# Altium PCB PCB2.PcbDoc
Units mil, origin at the board's own origin, x right, y up, seen from the top; angles counter-clockwise.
Board outline 3955 x 3395 mil, 2 copper layers (Top Layer, Bottom Layer); 46 components, 53 nets, 193 pads, 14 vias.
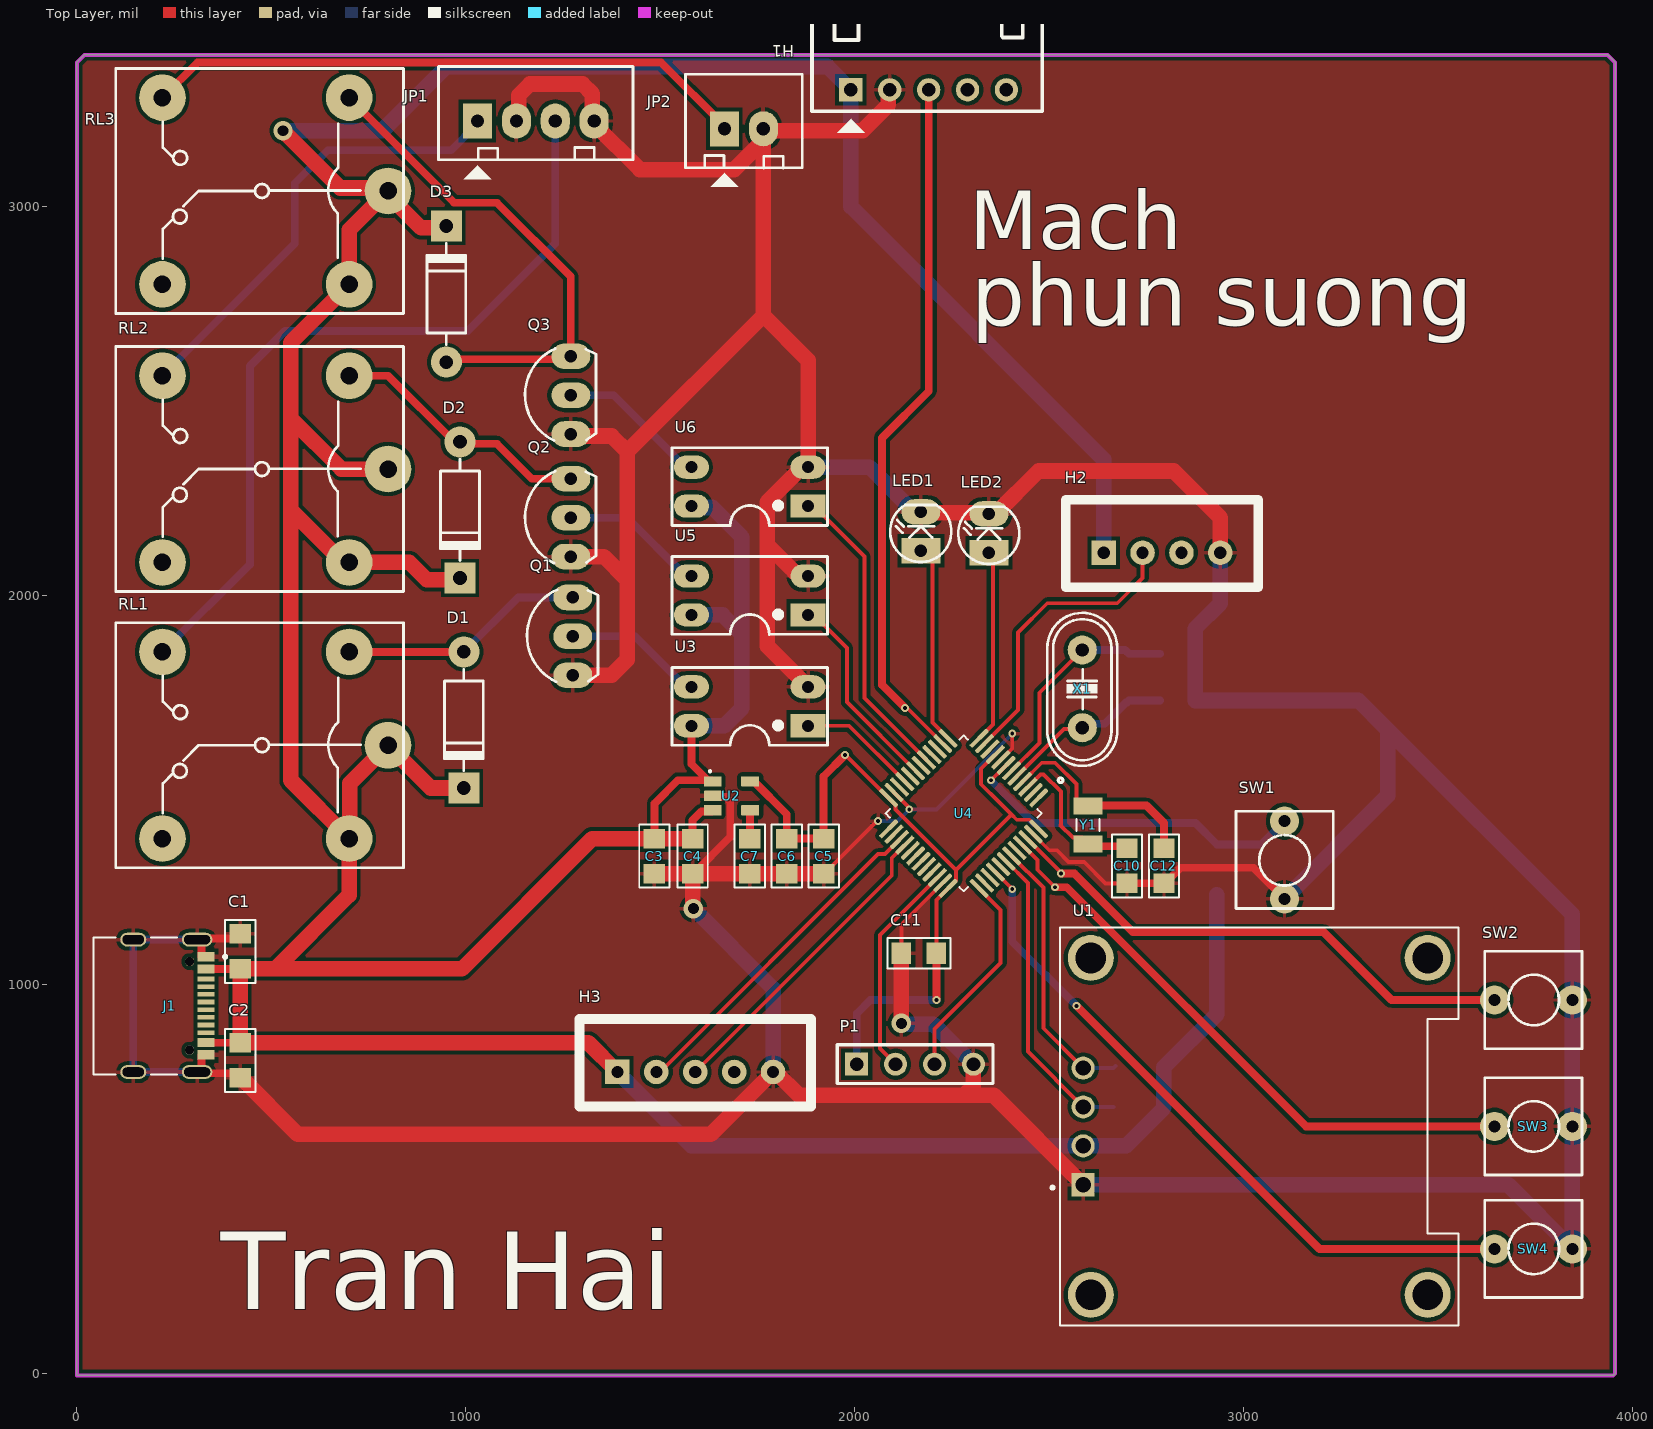
[diagram p0: Top Layer view]
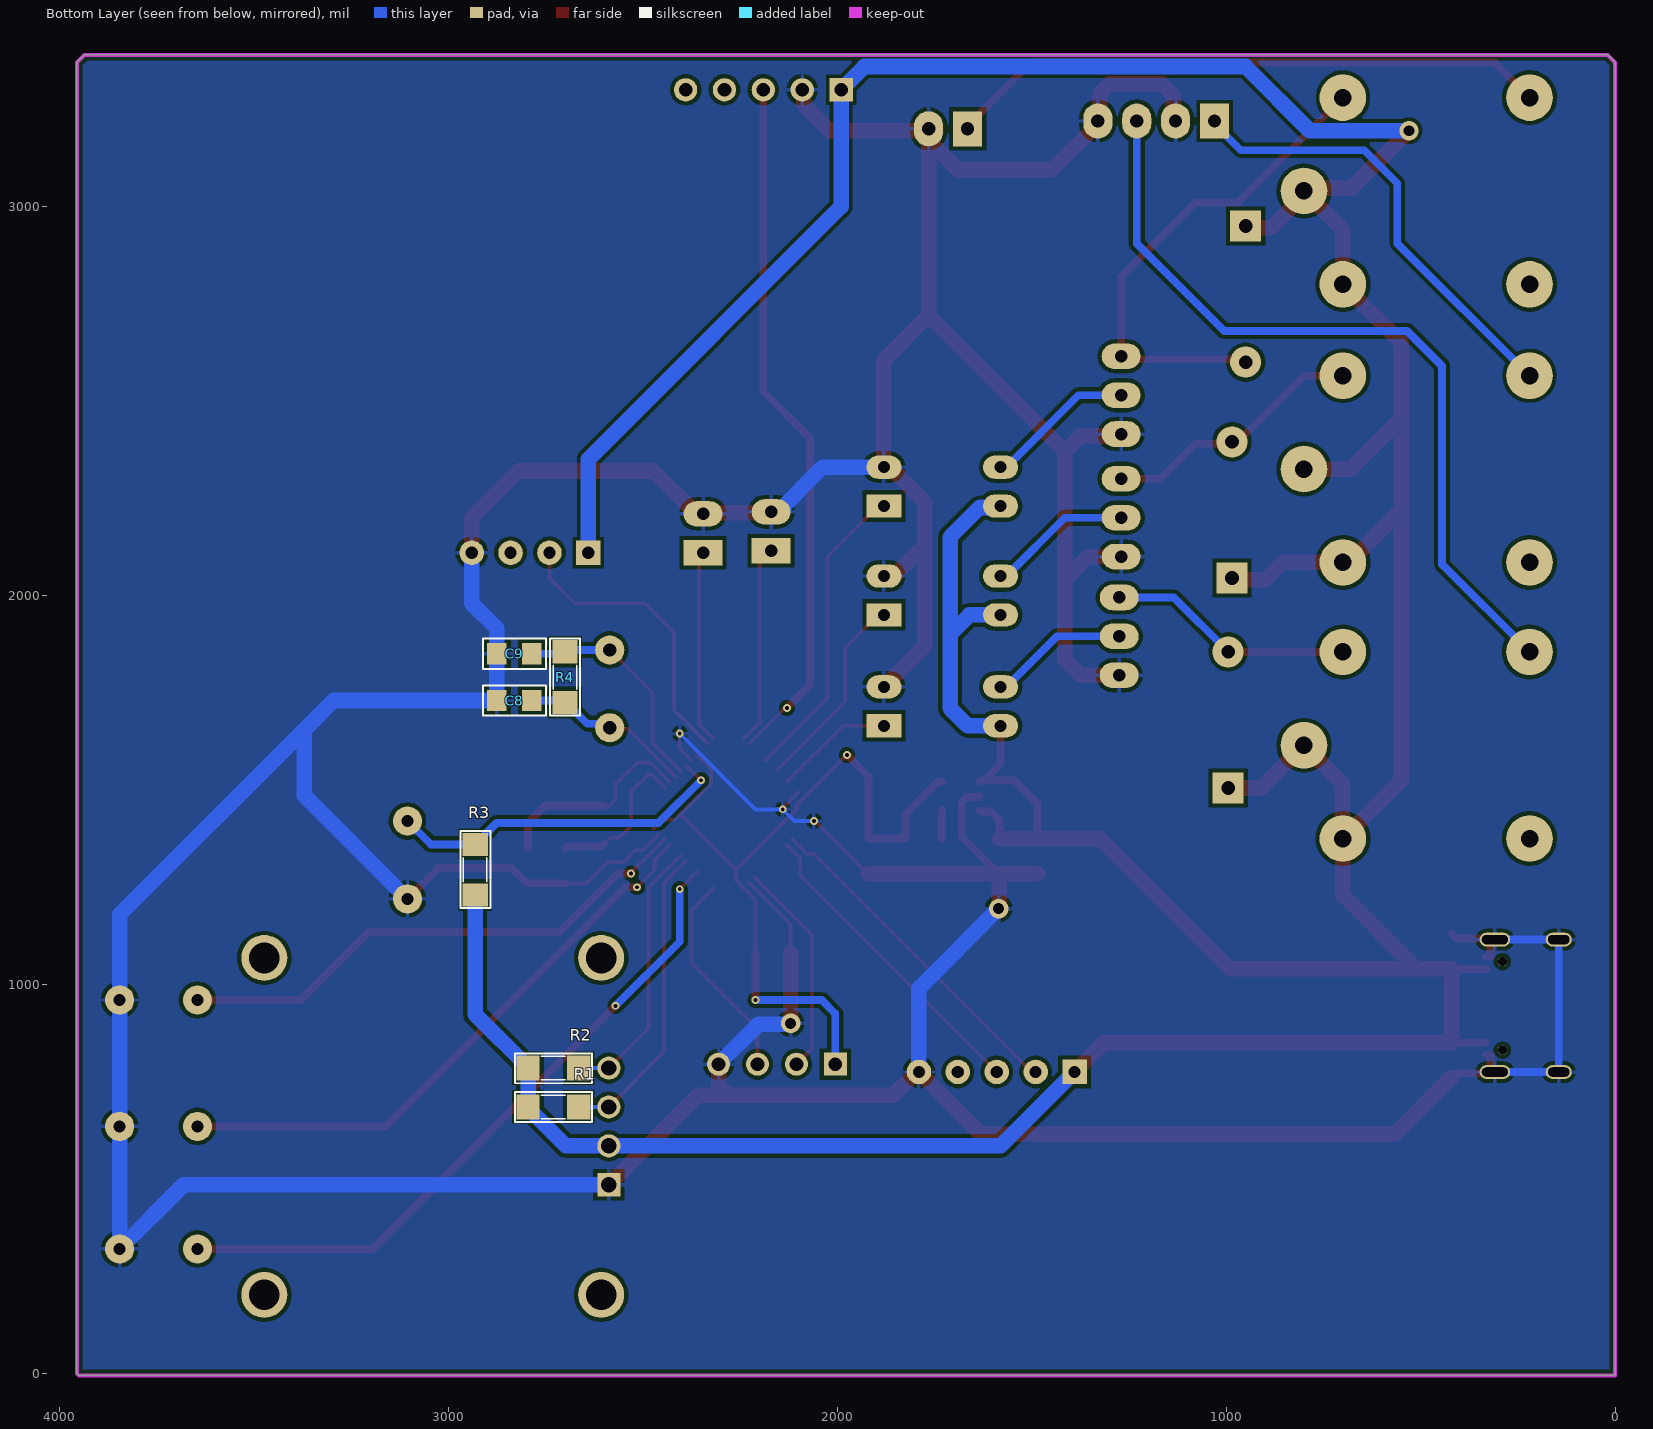
[diagram p1: Bottom Layer view, seen from below]
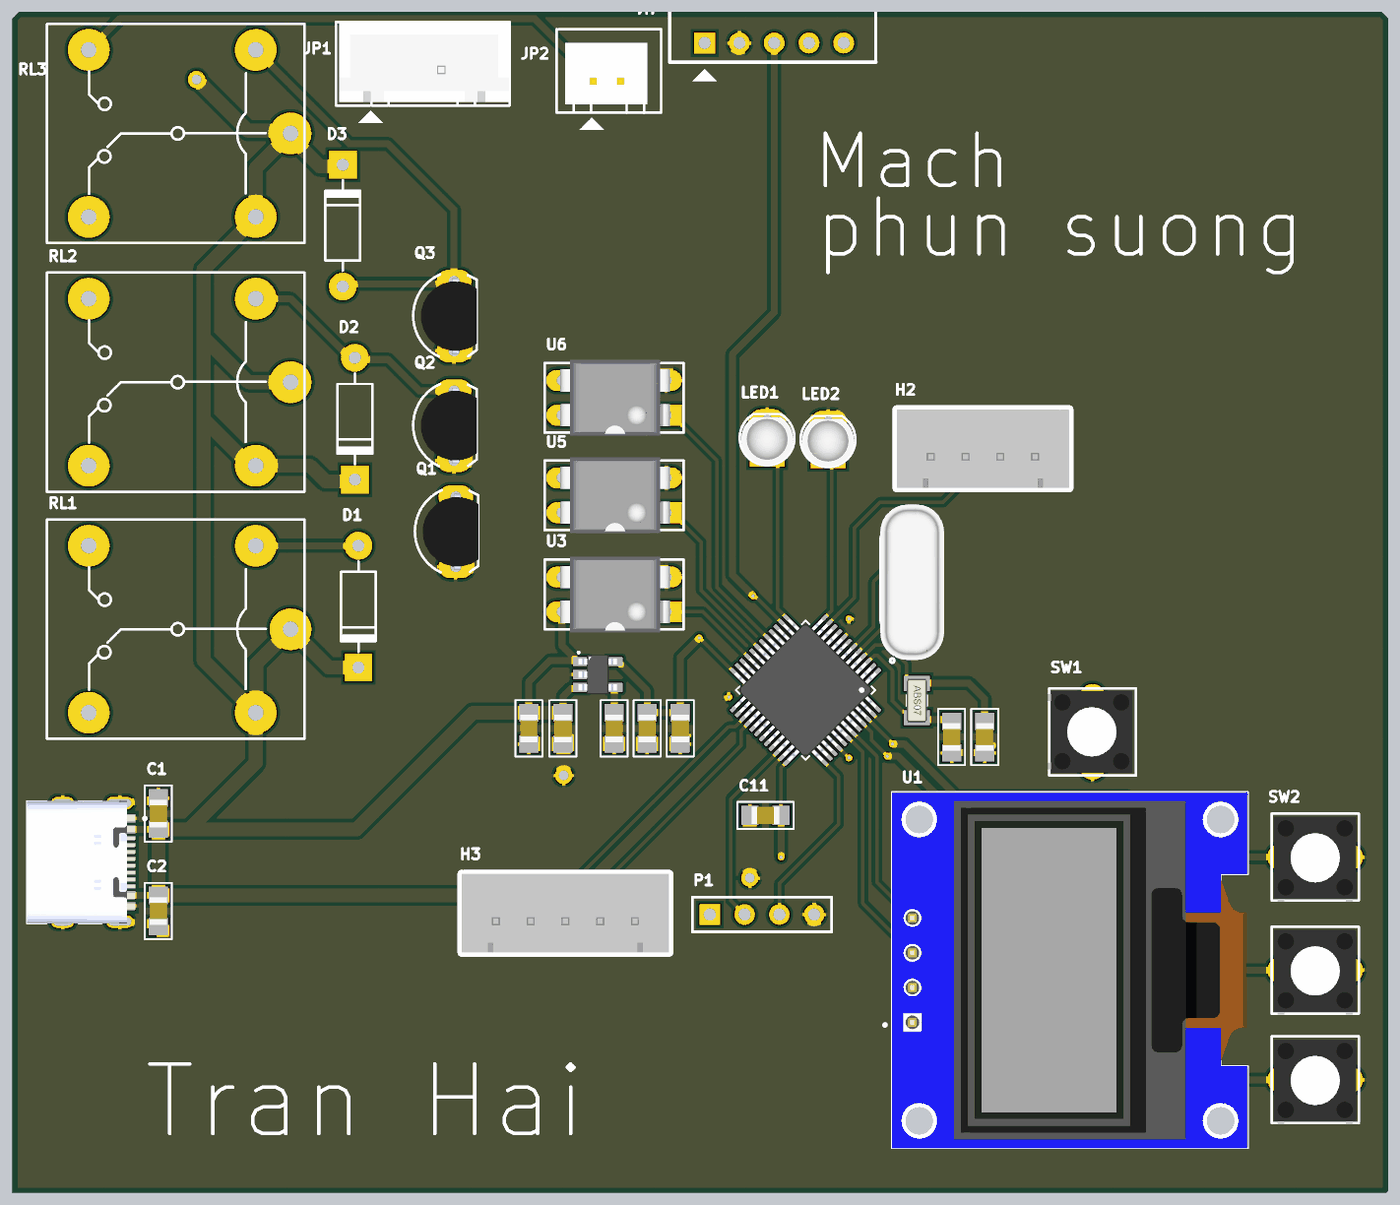
[diagram p2: 3D render of the assembled board from above, using the file's embedded part models]
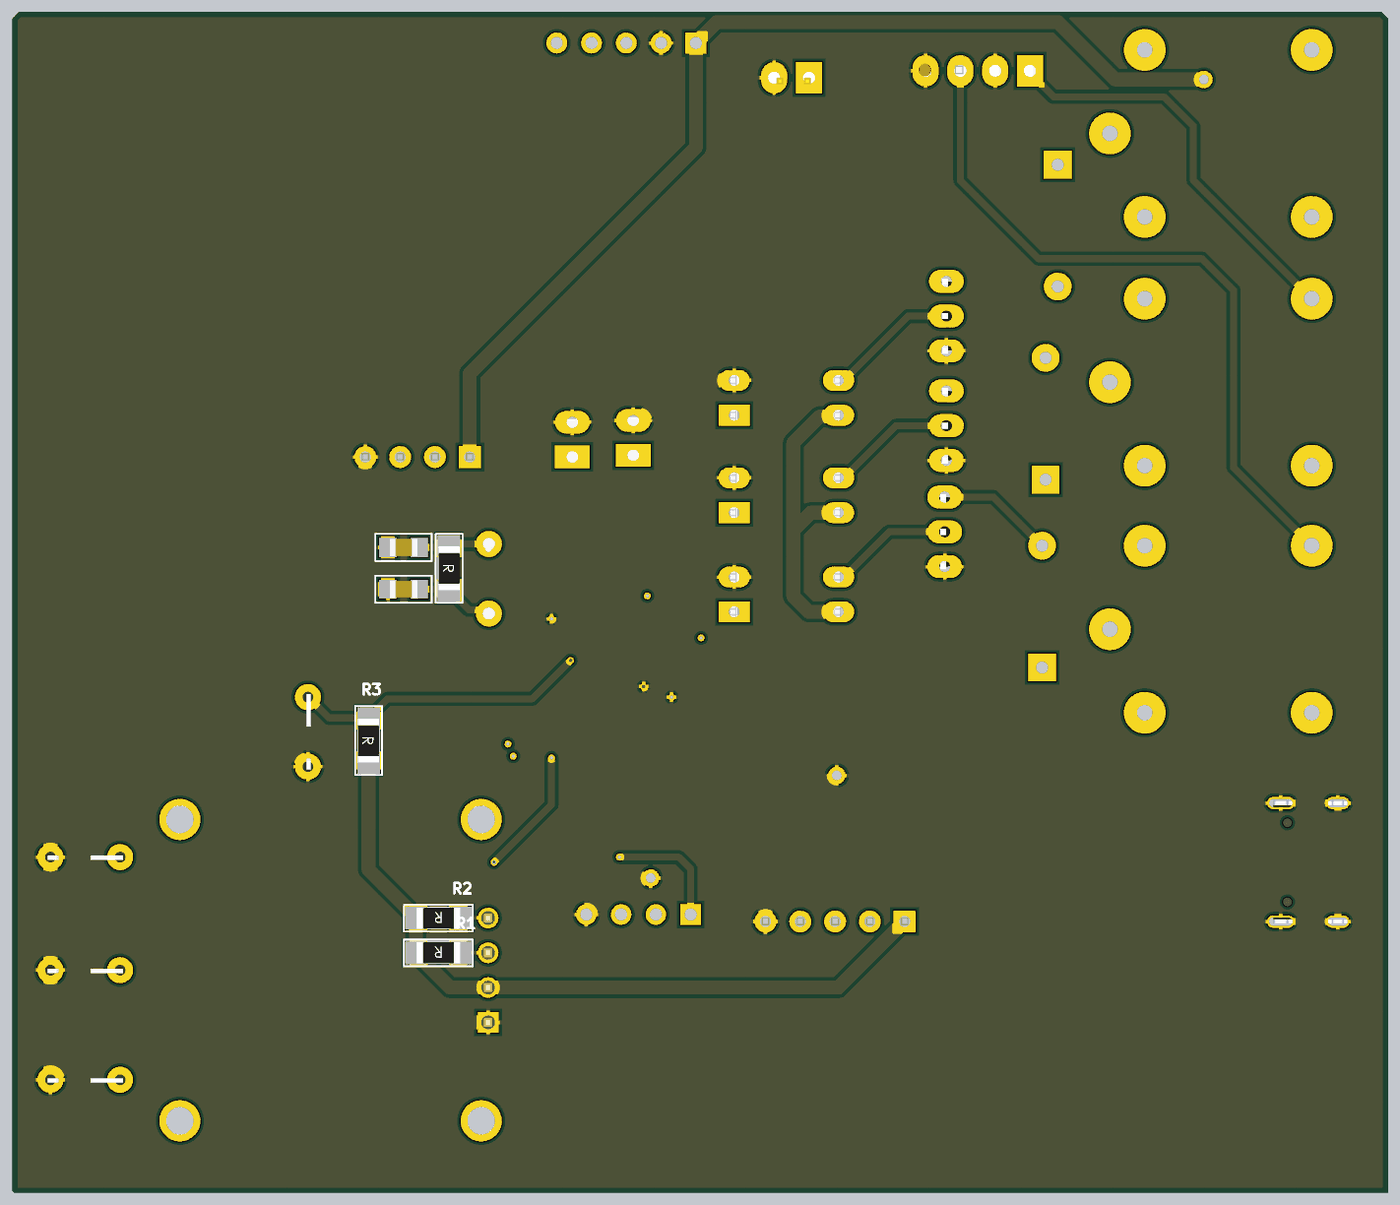
[diagram p3: 3D render of the assembled board from below, using the file's embedded part models]

## Layer stack, top to bottom
Top Solder: solder mask 0.4, Solder Resist, Dk 3.5
Top Layer: signal copper 1.4
Dielectric 1: dielectric 12.6, FR-4, Dk 4.8
Bottom Layer: signal copper 1.4
Bottom Solder: solder mask 0.4, Solder Resist, Dk 3.5

## Board outline
0,-5 0,3370 20,3390 3935,3390 3955,3370 3955,0 3950,-5

## Design rules (kind name [scope] priority, off if disabled: settings)
Clearance [All] p1: gap=10 ignorepadtopadclearanceinfootprint=FALSE except(0: Arc-Hole Track-Hole SMDPad-Hole THPad-Hole Text-Hole; 5: Arc-Arc Arc-Track Arc-SMDPad Arc-THPad Track-Track Track-SMDPad Track-THPad SMDPad-SMDPad SMDPad-THPad THPad-THPad)
PolygonConnect [All] p1: connectstyle=Relief reliefconductorwidth=10 reliefentries=4 polygonreliefangle="90 Angle" airgapwidth=10
RoutingVias [All] p1: holewidth=15 width=30 viastyle="Through Hole" minholewidth=10 minwidth=20 maxholewidth=28 maxwidth=50
SolderMaskExpansion [All] p1: expansion=4 istentingtop=FALSE
Width [All] p1: maxlimit=40 minlimit=10 preferedwidth=20 minimp=50.000000 maximp=50.000000 favimp=50.000000
30 further rules are at their usual default settings.

## Components (designator, comment, footprint, x,y, rotation, side; value= is the part's Value field where it differs from the comment)
C1 "0805" C-0805 420,1085 r270 top value=103
C2 "0805" C-0805 420,805 r90 top value=103
C3 "103" C-0805 1485,1330 r90 top
C4 "103" C-0805 1582.99,1329.84 r90 top
C5 "103" C-0805 1920,1330 r90 top
C6 "103" C-0805 1825,1330 r90 top
C7 "103" C-0805 1730,1330 r90 top
C8 "103" C-0805 2830,1730 r180 bottom
C9 "103" C-0805 2830,1850 r180 bottom
C10 "103" C-0805 2700,1305 r90 top
C11 "103" C-0805 2165,1080 r0 top
C12 "103" C-0805 2795,1305 r90 top
D1 "1N4007" D1A 995,1855 r90 top
D2 "1N4007" D1A 985,2395 r90 top
D3 "1N4007" D1A 950,2600 r270 top
H1 "HLK LD2410c" "Header 5P DC 2.54" 1990,3300 r90 top
H2 "DHT22" XH2.54M-4 2640,2110 r0 top
H3 "HY SRF05" XH2.54M-5 1390,775 r0 top
J1 "TYPE-C-31-M-12" HRO_TYPE-C-31-M-12 145,945 r270 top
JP1 "PHUN SUONG" CON4 1030,3220 r0 top value="Connector 4"
JP2 "QUAT" CON2 1665,3200 r0 top value="Connector 2"
LED1 "LED MODE" LED-3 2170,2115 r90 top value="LED 3 ly Single Colour"
LED2 "LED STATE" LED-3 2345,2110 r90 top value="LED 3 ly Single Colour"
P1 "Header 4" HDR1X4 2005,795 r0 top
Q1 "NPN_EBC" QTO-92 1275,1895 r90 top
Q2 "NPN_EBC" QTO-92 1270,2200 r90 top
Q3 "NPN_EBC" QTO-92 1270,2515 r90 top
R1 "1k" SM-1206 2730,685 r0 bottom value="R1/4W - 1K"
R2 "1k" SM-1206 2730,785 r0 bottom value="R1/4W - 1K"
R3 "1k" SM-1206 2931,1295 r270 bottom value="R1/4W - 1K"
R4 "1k" SM-1206 2700,1790 r270 bottom value="R1/4W - 1K"
RL1 "Relay 10A/12V" RL_SPDT_10A 800,1615 r180 top value="Relay SPDT, 10A, 12V"
RL2 "Relay 10A/12V" RL_SPDT_10A 800,2325 r180 top value="Relay SPDT, 10A, 12V"
RL3 "Relay 10A/12V" RL_SPDT_10A 800,3040 r180 top value="Relay SPDT, 10A, 12V"
SW1 "SW" SW2 3105,1220 r90 top value="SW chip 2 pin"
SW2 "SW" SW2 3845,960 r180 top value="SW chip 2 pin"
SW3 "SW" SW2 3845,635 r180 top value="SW chip 2 pin"
SW4 "SW" SW2 3845,320 r180 top value="SW chip 2 pin"
U1 "DM-OLED096-636" MODULE_DM-OLED096-636 3040,635 r90 top
U2 "RT9193-33GB" SOT94P279X129-5N 1682.99,1484.84 r0 top
U3 "PC817" DIP4/W0.3 1880,1665 r90 top
U4 "STM32F103C8T6" QFP50P900X900X160-48N 2280,1440 r225 top
U5 "PC817" DIP4/W0.3 1880,1950 r90 top
U6 "PC817" DIP4/W0.3 1880,2230 r90 top
X1 "4Mhz" XT2 2585,1760 r90 top
Y1 "ABS07-32.768KHZ-T" XTAL_ABS07-32.768KHZ-T 2600,1410 r270 top

## Footprints (in the part's own frame and the unit in brackets; to place one, negate y for a bottom-side part, rotate by r counter-clockwise, add the part's x,y. Pads: shape width x height; smd on the part's side, far side on the other; paste and mask are expansions set on the pad)
C-0805 [mil] "Compoment SMD 80x50mil"
  rect 50x55 smd: 1(-45,0) 2(45,0)
  silkscreen extent -81,-39 81,39, body extent -40,-25 40,25, height 24
CON2 [mil] "CON2"
  rect 75x90 hole 34: 1(0,0)
  oval 75x90 hole 34: 2(100,0)
  silkscreen extent -100,-150 200,140, body extent -76,-77 160,100, height 236
CON4 [mil] "CON4"
  rect 75x90 hole 34: 1(0,0)
  oval 75x90 hole 34: 2(100,0) 3(200,0) 4(300,0)
  silkscreen extent -100,-150 400,140, body extent -90,-90 398,136, height 276
D1A [mil] "Diode 1A, W 100mil, L 350mil"
  round 80 hole 35: 1(0,0)
  rect 80x80 hole 35: 2(-350,0)
  silkscreen extent -305,-50 -45,50, body extent -366,-42 16,41, height 100
DIP4/W0.3 [mil] "4 PIN, W 300mil, Pin to pin 100mil"
  rect 60x90 hole 31: 1(0,0)
  oval 60x90 hole 31: 2(100,0) 3(100,300) 4(0,300)
  silkscreen extent -50,-50 150,350, body extent -59,-10 159,305, height 170
HDR1X4 [mm] "Connector; Header; 4 Position"
  rect 1.5x1.5 hole 0.9: 1(0,0)
  round 1.5 hole 0.9: 2(2.54,0) 3(5.08,0) 4(7.62,0)
  silkscreen extent -1.27,-1.27 8.89,1.27, body extent -1.27,-1.27 8.89,1.27, height 7
"Header 5P DC 2.54" [mil]
  rect 60x60 hole 35: 1(0,0)
  round 60 hole 35: 2(0,-100) 3(0,-200) 4(0,-300) 5(0,-400)
  silkscreen extent -110,-492 232,100
HRO_TYPE-C-31-M-12 [mm]
  rect 0.6x1.14 smd mask+0.05: A1_B12(-3.2,4.75) A4_B9(-2.4,4.75) B1_A12(3.2,4.75) B4_A9(2.4,4.75)
  rect 0.3x1.14 smd mask+0.05: A5(-1.25,4.75) A6(-0.25,4.75) A7(0.25,4.75) A8(1.25,4.75) B5(1.75,4.75) B6(0.75,4.75) B7(-0.75,4.75) B8(-1.75,4.75)
  oval 0.9x2 hole 0.6 slot 1.7 at 90 deg: S1(-4.325,4.17) S2(4.325,4.17)
  oval 0.9x1.7 hole 0.6 slot 1.4 at 90 deg: S3(-4.325,0) S4(4.325,0)
  round 0.6 hole 0.6 unplated: ""(-2.89,3.68) ""(2.89,3.68)
  silkscreen extent -4.47,-2.6 4.47,6.1, body extent -4.47,-2.6 4.47,5.31, height 3.31
LED-3 [mil] "LED 2 PIN, 3ly Only colour"
  rect 65x100 hole 32: 1(0,0)
  oval 65x100 hole 32: 2(100,0)
  silkscreen extent -29,-78 118,79, body extent -29,-75 109,75, height 256
MODULE_DM-OLED096-636 [mm]
  rect 1.508x1.508 / inner round 1.508 / far side rect 1.508x1.508 hole 1: 1(-3.81,11.5)
  round 1.508 hole 1: 2(-1.27,11.5) 3(1.27,11.5) 4(3.81,11.5)
  round 3 hole 2: S1(-11,11) S2(11,11) S3(11,-11) S4(-11,-11)
  silkscreen extent -13,-13 13,13.6, body extent -13,-13 13,13, height 5.66
QFP50P900X900X160-48N [mm]
  rrect50% 1.56x0.28 smd: 1(-4.18,2.75) 2(-4.18,2.25) 3(-4.18,1.75) 4(-4.18,1.25) 5(-4.18,0.75) 6(-4.18,0.25) 7(-4.18,-0.25) 8(-4.18,-0.75) 9(-4.18,-1.25) 10(-4.18,-1.75) 11(-4.18,-2.25) 12(-4.18,-2.75) 25(4.18,-2.75) 26(4.18,-2.25) 27(4.18,-1.75) 28(4.18,-1.25) 29(4.18,-0.75) 30(4.18,-0.25) 31(4.18,0.25) 32(4.18,0.75) 33(4.18,1.25) 34(4.18,1.75) 35(4.18,2.25) 36(4.18,2.75)
  rrect50% 0.28x1.56 smd: 13(-2.75,-4.18) 14(-2.25,-4.18) 15(-1.75,-4.18) 16(-1.25,-4.18) 17(-0.75,-4.18) 18(-0.25,-4.18) 19(0.25,-4.18) 20(0.75,-4.18) 21(1.25,-4.18) 22(1.75,-4.18) 23(2.25,-4.18) 24(2.75,-4.18) 37(2.75,4.18) 38(2.25,4.18) 39(1.75,4.18) 40(1.25,4.18) 41(0.75,4.18) 42(0.25,4.18) 43(-0.25,4.18) 44(-0.75,4.18) 45(-1.25,4.18) 46(-1.75,4.18) 47(-2.25,4.18) 48(-2.75,4.18)
  silkscreen extent -6.15,-3.6 3.6,3.6, body extent -4.5,-4.5 4.5,4.5, height 1.6
QTO-92 [mil] "TO-92"
  oval 66x100 hole 32: 1(-100,0) 2(0,0) 3(100,0)
  silkscreen extent -117,-65 120,118, body extent -109,-66 109,95, height 385
RL_SPDT_10A [mil] "Relay SPDT, 5 pin, 10A,W 650mil, L 800mil, H 800mil"
  round 120 hole 45: 1(0,0) 2(580,240) 3(580,-240) 4(100,-240) 5(100,240)
  silkscreen extent -40,-315 700,315
SM-1206 [mil] "Compoment SMD 120x60mil"
  rect 60x65 smd: 1(-65,0) 2(65,0)
  silkscreen extent -99,-38 99,39, body extent -83,-35 83,36, height 25
SOT94P279X129-5N [mm]
  rrect12% 1.17x0.67 smd: 1(-1.22,0.94) 2(-1.22,0) 3(-1.22,-0.94) 4(1.22,-0.94) 5(1.22,0.94)
  silkscreen extent -1.47,1.53 -1.33,1.67, body extent -1.4,-1.45 1.4,1.45, height 1.3
SW2 [mil] "SW button 2pin, 250x 250 mil"
  round 75 hole 31: 1(0,0) 2(200,0)
  silkscreen extent -25,-125 225,125, body extent -18,-116 218,128, height 197
XH2.54M-4 [mm]
  rect 1.6x1.6 hole 0.8: 1(0,0)
  round 1.6 hole 0.8: 2(2.54,0) 3(5.08,0) 4(7.62,0)
  silkscreen extent -2.48,-2.26 10.1,3.46, body extent -2.48,-2.26 10.1,3.48, height 6.91
XH2.54M-5 [mm]
  rect 1.6x1.6 hole 0.8: 1(0,0)
  round 1.6 hole 0.8: 2(2.54,0) 3(5.08,0) 4(7.62,0) 5(10.16,0)
  silkscreen extent -2.48,-2.26 12.64,3.46, body extent -2.48,-2.26 12.64,3.48, height 6.91
XT2 [mil] "Footpin for Crystal 2 pin"
  round 75 hole 34: 1(-100,0) 2(100,0)
  silkscreen extent -198,-90 195,90, body extent -233,-93 213,90, height 138
XTAL_ABS07-32.768KHZ-T [mm]
  rect 1.1x1.9 smd: 1(-1.25,0) 2(1.25,0)
  silkscreen extent -0.38,-0.75 0.38,0.75, body extent -1.6,-0.75 1.6,0.75, height 0.89

## Part data
C1 C2 C3 C4 C5 C6 C7 C8 C9 C10 C11 C12: library part C, "Cap SMD"
D1 D2 D3: library part D1A, "Diode 1A"
H1: library part "Header 5P 2.54 Duc Cong", "Cắm", Chung_Loai=Cắm, Don_Vi=Con, Ma_Hang=MH001308, Ten_Linh_Kien="Header 5P XH2.54-5P Đực Cong"
H2: library part "Header 4P 2.54 Duc Thang", "Cắm", Chung_Loai=Cắm, Don_Vi=Con, Ma_Hang=MH001285, Ten_Linh_Kien="Header 4P XH2.54-4P Đực Thẳng"
H3: library part "Header 5P 2.54 Duc Thang", "Cắm", Chung_Loai=Cắm, Don_Vi=Con, Ma_Hang=MH001298, Ten_Linh_Kien="Header 5P XH2.54-5P Đực Thẳng"
J1: "USB Connectors 24 Receptacle 1 8.94*7.3mm RoHS", Package=Package, Availability="Not in stock", Check_prices=https://www.snapeda.com/parts/TYPE-C-31-M-12/HRO+Electronics+Co.%252C+Ltd./view-part/?ref=eda, MF="HRO Electronics Co., Ltd.", MP=TYPE-C-31-M-12, Price=None, SnapEDA_Link=https://www.snapeda.com/parts/TYPE-C-31-M-12/HRO+Electronics+Co.%252C+Ltd./view-part/?ref=snap
JP1: library part Con4, "Connector 4"
JP2: library part Con2, "Connector 2"
LED1 LED2: library part LED_THU, "LED Single colour Green and Red"
P1: "Header, 4-Pin", LatestRevisionDate=17-Jul-2002, LatestRevisionNote="Re-released for DXP Platform.", Publisher="Altium Limited"
Q1 Q2 Q3: "NPN Transistor"
R1 R2 R4: library part R, "Resistor 1/4W"
R3: library part RES, "Resistor 1/4W"
RL1 RL2 RL3: library part "Relay 1", "Relay SPDT,10A - 12VDC 5 Pin"
SW1 SW2 SW3 SW4: library part SW2, "Switch button 2 pin"
U1: "0.96â€ 128 X 64 MONOCHROME GRAPHIC OLED DISPLAY MODULE - I2C", Package=Package, Check_prices=https://www.snapeda.com/parts/DM-OLED096-636/Display+Module/view-part/?ref=eda, MF="Display Module", MP=DM-OLED096-636, SnapEDA_Link=https://www.snapeda.com/parts/DM-OLED096-636/Display+Module/view-part/?ref=snap
U2: "Linear Voltage Regulator IC Positive Fixed 1 Output 300mA TSOT-23-5", Package="SOT-23-5 Richtek", Check_prices=https://www.snapeda.com/parts/RT9193-33GB/Richtek+USA+Inc./view-part/?ref=eda, Digi-Key_Part_Number=1028-1014-2-ND, MF="Richtek USA", MP=RT9193-33GB, Purchase-URL=https://pricing.snapeda.com/search/part/RT9193-33GB/?ref=eda, SnapEDA_Link=https://www.snapeda.com/parts/RT9193-33GB/Richtek+USA+Inc./view-part/?ref=snap
U3 U5 U6: "Single Opto"
U4: "ARM® Cortex®-M3 STM32F1 Microcontroller IC 32-Bit 72MHz 64KB (64K x 8) FLASH 48-LQFP (7x7)", Package="LQFP-48 STMicroelectronics", Check_prices=https://www.snapeda.com/parts/STM32F103C8T6/STMicroelectronics/view-part/?ref=eda, MF=STMicroelectronics, MP=STM32F103C8T6, SnapEDA_Link=https://www.snapeda.com/parts/STM32F103C8T6/STMicroelectronics/view-part/?ref=snap
X1: library part XT2, "Crystal For all Crystal 2pin."
Y1: "32.768 kHz Â±20ppm Crystal 12.5pF 70 kOhms 2-SMD, No Lead", Package="SMD-2 Abracon LLC", Availability="In Stock", Check_prices=https://www.snapeda.com/parts/ABS07-32.768KHZ-T/Abracon+LLC/view-part/?ref=eda, MF=Abracon, MP=ABS07-32.768KHZ-T, Price=None, Purchase-URL=https://pricing.snapeda.com/search/part/ABS07-32.768KHZ-T/?ref=eda, SnapEDA_Link=https://www.snapeda.com/parts/ABS07-32.768KHZ-T/Abracon+LLC/view-part/?ref=snap

## Via types
v1: diameter 20, hole 10, Top Layer to Bottom Layer, 11 vias
v2: diameter 50, hole 28, Top Layer to Bottom Layer, 3 vias

## Nets (pads, with @x,y where several pads share a name; then routed paths per layer and width w, separated by ;. In a path a pad name is that pad's centre, name@x,y a point inside that pad or via, vN(x,y) a via of type N, cw(c..) or ccw(c..) an arc to the next point about the centre after c; other vN are vias at no path point)
3.3V: C5.2 C6.2 C11.2 P1.1 U2.5 U4.9 U4.24 U4.36 U4.48 | length 2132.8
  Top Layer w10: v1(1975,1590) 1976.16,1590 2086.35,1479.81 U4.24 2087.08,1479.09 2104.89,1461.27 2104.89,1450.11 2260.74,1294.26 ; C11.2 2210,1216.89 U4.36 2258.01,1264.89 2258.01,1265.62 2260.74,1268.35 2260.74,1294.26 ; U4.9 2325,1554.6 2325,1514.64 2370.6,1469.04 2370.96,1469.04 2403.24,1436.76 ; U4.48 2472.2,1400.19 2448.95,1423.44 2416.56,1423.44 2403.24,1436.76 ; 2260.74,1294.26 2403.24,1436.76
  Top Layer w20: U2.5 1740.87,1521.85 1825,1437.72 C6.2 C5.2 1920,1535 v1(1975,1590) ; v1(2210,960) C11.2
  Bottom Layer w20: P1.1 2005,925 2040,960 v1(2210,960)
5V: C1.2 C2.2 C3.2 C4.2 D1.2 D2.2 D3.2 H1.1 H2.1 H3.1 J1.A4_B9 J1.B4_A9 R1.2 R2.2 R3.2 RL1.1 RL1.5 RL2.1 RL2.5 RL3.1 RL3.5 U1.2 U2.1 U2.3 U3.4 U5.4 U6.4 | length 13358
  Top Layer w20: J1.B4_A9 332.26,850.26 C2.2@419.74,850.26 ; J1.A4_B9 332.26,1039.74 419.74,1039.74 C1.2 ; C3.2 1485,1465 1545,1525 U2.1@1621.97,1525 ; U3.4 1580,1566.97 U2.1@1621.97,1525 ; C4.2 1582.99,1422.01 1605.63,1444.65 1631.77,1444.65 U2.3 ; U2.1 1631.81,1525 U2.1@1621.97,1525
  Top Layer w40: C2.2@419.74,850.26 420,850.51 C1.2 510,1040 ; C2.2 1315,850 H3.1 ; v2(530,3195) 677.29,3047.71 792.29,3047.71 RL3.1 RL3.1@800,3039.68 ; RL2.1 680,2325 550,2455 ; D3.2 945,2945 885,2945 800,3030 RL3.1@800,3039.68 ; D2.2 980,2040 900,2040 855,2085 RL2.5 685,2085 550,2220 ; D1.2 910,1505 RL1.1 701.65,1516.65 701.65,1376.65 RL1.5 ; C4.2 1582.91,1374.92 1485.08,1374.92 C3.2 1325,1375 990,1040 510,1040 ; 510,1040 700,1230 RL1.5 ; 550,2220 550,1525 RL1.5 ; 550,2220 550,2455 ; 550,2455 550,2650 RL3.5 700,2939.68 RL3.1@800,3039.68
  Bottom Layer w40: v2(530,3195) 785,3195 950,3360 1930,3360 H1.1 1990,3000 2640,2350 H2.1 ; H3.1 1580,585 U1.2 2697.5,585 2795,682.5 R1.2 R2.2 2795,787.5 2931,923.5 R3.2 ; U3.4 1665,1665 1710,1710 1710,1900 ; U5.4 1660,1950 1710,1900 ; U6.4 1583.83,2226.17 1633.83,2226.17 1710,2150 1710,1900
BOOT0: U4.44
BOOT1: U4.20
fan: JP2.1 RL3.3 | length 1557.1
  Top Layer w20: RL3.3 310,3370 1502.5,3370 1665,3207.5 JP2.1
GND: C1.1 C2.1 C3.1 C4.1 C5.1 C6.1 C7.1 C8.1 C9.1 C10.1 C11.1 C12.1 H1.2 H2.4 H3.5 J1.A1_B12 J1.B1_A12 J1.S1 J1.S2 J1.S3 J1.S4 JP1.2 JP1.4 JP2.2 LED1.2 LED2.2 P1.4 Q1.1 Q2.1 Q3.1 SW1.1 SW2.1 SW3.1 SW4.1 U1.1 U2.2 U3.2 U4.8 U4.23 U4.35 U4.47 U5.2 U6.2 | length 17109
  Top Layer w10: C5.1 1922.5,1285 2057.5,1420 v1(2060,1420) ; U4.23 2138.26,1456.46 2138.26,1452.09 v1(2140.18,1450.18) ; C11.1 2120,1154.73 U4.35 ; U4.8 2405,1606.76 v1(2405,1645) ; U4.47 2459,1386 2500,1345 2520,1345 2550,1315 2590,1315 2645,1260 C10.1
  Top Layer w20: J1.S1 312.13,1118.23 408.23,1118.23 C1.1 ; J1.S1@320.59,1108.15 320.59,1072.8 322.4,1070.98 J1.A1_B12 ; J1.B1_A12 322.4,819.02 320.59,817.2 320.59,781.85 313.46,774.72 J1.S2 312.13,771.77 408.23,771.77 C2.1 ; C4.1@1583.07,1284.92 1585.57,1284.92 1680,1379.35 1680,1469.94 1668.28,1481.65 1638.15,1481.65 U2.2 ; C10.1 C12.1 2797.5,1260 2837.5,1300 3025,1300 SW1.1
  Top Layer w40: C2.1 422.5,760 567.5,615 1630,615 H3.5 1796.22,775 1856.22,715 2281.57,715 ; JP1.2 1136.7,3226.7 1136.7,3286.7 1165,3315 1300,3315 1325,3290 1325,3225 JP1.4 1330,3212.5 1447.5,3095 1690,3095 1750,3155 1765,3155 ; Q2.1 1355,2100 1415,2040 ; Q3.1 1274.97,2410.03 1374.97,2410.03 1415,2370 ; Q1.1 1375,1795 1415,1835 1415,2040 ; C3.1 1485.08,1284.92 1582.91,1284.92 C4.1 1583.07,1284.92 1584,1284 1584,1196 v2(1585,1195) ; C4.1@1585.57,1284.92 1729.92,1284.92 C7.1 C6.1 C5.1 ; U3.2 1870.41,1765 1861.17,1774.24 1861.17,1783.83 1775,1870 1775,2130 ; U5.2 1859.59,2050 1849.59,2060 1845,2060 1775,2130 ; H1.2 2086.17,3296.17 2086.17,3261.17 2020,3195 1770,3195 JP2.2 1765,3155 ; v2(2120,900) C11.1 ; LED1.2 2172.5,2212.5 2342.5,2212.5 LED2.2 2362.5,2210 2472.5,2320 2820,2320 2940,2200 H2.4 ; P1.4 2305,738.43 2281.57,715 ; U1.1 2357.24,715 2281.57,715 ; 1415,2040 1415,2370 ; 1415,2370 1765,2720 ; 1765,2720 1880,2605 U6.2 1865,2330 1775,2240 1775,2130 ; 1765,2720 1765,3155
  Bottom Layer w10: v1(2060,1420) 2110,1420 v1(2140.18,1450.18) 2210.18,1450.18 v1(2405,1645)
  Bottom Layer w20: J1.S2 J1.S4 J1.S3 J1.S1
  Bottom Layer w40: v2(1585,1195) 1790,990 H3.5 ; U6.2 2037.5,2330 2152.5,2215 LED1.2 ; v2(2120,900) 2121.91,898.09 2201.91,898.09 P1.4 ; U1.1 3680,485 SW4.1 SW3.1 SW2.1 3845,1180 3370,1655 ; H2.4 2940,1980 2875,1915 C9.1 C8.1 3295,1730 3370,1655 ; SW1.1 3370,1485 3370,1655
NetC7_2: C7.2 U2.4 | length 73.3
  Top Layer w20: C7.2 1730.51,1375.51 1730.51,1447.32 U2.4
NetD1_1: D1.1 Q1.3 RL1.4 | length 633
  Top Layer w20: RL1.4 D1.1
  Bottom Layer w20: D1.1 1135,1995 Q1.3
NetD2_1: D2.1 Q2.3 RL2.4 | length 679.8
  Top Layer w20: RL2.4 800,2565 970,2395 D2.1 990,2390 1080,2390 1170,2300 Q2.3
NetD3_1: D3.1 Q3.3 RL3.4 | length 1291.8
  Top Layer w20: RL3.4 970,3010 1080,3010 1270,2820 Q3.3 1262.5,2607.5 957.5,2607.5 D3.1
NetQ1_2: Q1.2 U3.3 | length 358.8
  Bottom Layer w20: Q1.2 1435,1895 1565,1765 U3.3
NetQ2_2: Q2.2 U5.3 | length 372.1
  Bottom Layer w20: Q2.2 1415,2200 1565,2050 U5.3
NetQ3_2: Q3.2 U6.3 | length 386.6
  Bottom Layer w20: Q3.2 1380,2515 1565,2330 U6.3
PA0: U4.10
PA1: H2.2 U4.11 | length 764.7
  Top Layer w10: U4.11 2420,1705.27 2420,1905 2495,1980 2675,1980 2740,2045 H2.2
PA2: LED2.1 U4.12 | length 495.8
  Top Layer w10: U4.12 2355,1668.11 2355,2100 LED2.1
PA3: LED1.1 U4.13 | length 512.6
  Top Layer w10: LED1.1 2172.5,2115 2200,2087.5 2200,1673.11 U4.13
PA4: H1.3 U4.14 | length 1798.4
  Top Layer w10: v1(2129.46,1710.74) 2131.38,1708.82 2136.45,1708.82 U4.14
  Top Layer w20: v1(2129.46,1710.74) 2070,1770.2 2070,2405 2190,2525 H1.3
PA5: U4.15
PA6: U4.16
PA7: U4.17 U6.1 | length 787.7
  Top Layer w10: U6.1 1895,2230 2025,2100 2025,1736.76 U4.17
PA8: U4.29
PA9: U4.30
PA10: U4.31
PA11: U4.32
PA12: U4.33
PA15: U4.38
PB0: U4.18
PB1: U4.19 U5.1 | length 524
  Top Layer w10: U5.1 1895,1950 1980,1865 1980,1726.08 U4.19
PB3: U4.39
PB4: SW4.2 U4.40 | length 1764.1
  Top Layer w10: U4.40 2361.57,1288.63 2405,1245.2 v1(2405,1245)
  Top Layer w20: v1(2570,945) 3195,320 SW4.2
  Bottom Layer w20: v1(2405,1245) 2405,1110 v1(2570,945)
PB5: U4.41
PB6: R1.1 U1.3 U4.42 | length 791.4
  Top Layer w10: U4.42 2445,1261.08 2445,827.24 U1.3
  Bottom Layer w10: U1.3 R1.1
PB7: R2.1 U1.4 U4.43 | length 706.6
  Top Layer w10: U4.43 2485,1248.92 2485,887.24 U1.4
  Bottom Layer w10: U1.4 R2.1 R2.1@2670,790
PB8: SW3.2 U4.45 | length 1528.1
  Top Layer w10: U4.45 2431.57,1358.43 2470,1320 2470,1295 v1(2515,1250)
  Top Layer w20: v1(2515,1250) 2545,1250 3160,635 SW3.2
PB9: SW2.2 U4.46 | length 1372.1
  Top Layer w10: U4.46 2530,1287.44 v1(2530,1285)
  Top Layer w20: v1(2530,1285) 2565,1285 2715,1135 3205,1135 3380,960 SW2.2
PB10: U3.1 U4.21 | length 308.2
  Top Layer w10: U3.1 1985.4,1665 U4.21
PB11: U4.22
PB12: U4.25
PB13: U4.26
PB14: H3.2 U4.27 | length 872.3
  Top Layer w10: H3.2 1500,775 2060,1335 2077.56,1335 U4.27
PB15: H3.3 U4.28 | length 806.6
  Top Layer w10: H3.3 2095,1280 2095,1324.6 U4.28
PC13: U4.2
PC14: C10.2 U4.3 Y1.2 | length 399.1
  Top Layer w10: U4.3 2477.5,1540.06 2485.78,1540.06 2530,1495.85 2530,1410 2529.14,1409.14 2560.84,1377.44 2583.35,1377.44 Y1.2
  Top Layer w20: Y1.2 2605.39,1355.39 2694.61,1355.39 C10.2
PC15: C12.2 U4.4 Y1.1 | length 536.8
  Top Layer w10: U4.4 2432.33,1521.57 2480.77,1570 2515,1570 2569.87,1515.13 2569.87,1475.87 2586.52,1459.21 Y1.1
  Top Layer w20: Y1.1 2600.79,1460 2750,1460 2795,1415 C12.2
PD0: C8.2 R4.2 U4.5 X1.1 | length 448.3
  Top Layer w10: U4.5 2538.36,1656.6 2581.6,1656.6 X1.1
  Bottom Layer w20: X1.1 2595.52,1670.52 2643.02,1670.52 2697.5,1725 R4.2 2705,1730 C8.2
PD1: C9.2 R4.1 U4.6 X1.2 | length 590
  Top Layer w10: U4.6 2475,1621.08 2475,1750 X1.2
  Bottom Layer w20: X1.2 2695,1860 R4.1 2705,1850 C9.2
RESET: R3.1 SW1.2 U4.7 | length 903.5
  Top Layer w10: v1(2350,1525) 2367.68,1542.68 2368.03,1542.68 2388.68,1563.33 U4.7
  Bottom Layer w20: v1(2350,1525) 2460,1415 2876,1415 R3.1 3045,1360 SW1.2
SWDCLK: P1.3 U4.37 | length 545.4
  Top Layer w10: P1.3 2205,885 2375,1055 2375,1191.89 U4.37
SWDIO: P1.2 U4.34 | length 557.5
  Top Layer w10: P1.2 2065,835 2065,1127.56 U4.34
VBAT: U4.1
"voi 1": JP1.1 RL2.3 | length 1176.5
  Bottom Layer w20: RL2.3 560,2905 560,3060 645,3145 962.5,3145 1030,3212.5 JP1.1
"voi 2": JP1.3 RL1.3 | length 2058.7
  Bottom Layer w20: RL1.3 445,2080 445,2590 535,2680 1005,2680 1230,2905 JP1.3
pads on no net: H1.4 H1.5 H2.3 H3.4 J1. J1.A5 J1.A6 J1.A7 J1.A8 J1.B5 J1.B6 J1.B7 J1.B8 RL1.2 RL2.2 RL3.2 U1.S1 U1.S2 U1.S3 U1.S4

## Polygon pours and split planes (outlines as drawn)
GND on Top Layer "GND_L01_P000" (solid, pour order 0): -5,3375 15,3395 3935,3395 3960,3370 3960,-5 3955,-10 -5,-10
GND on Bottom Layer "GND_L02_P001" (solid, pour order 1): -5,3370 20,3395 3940,3395 3960,3375 3960,0 3950,-10 -5,-10

## Keep-outs
Keep-Out Layer:
  lines w10: -3205,3210 -3150,3265 ; 4690,-2515 4700,-2505 ; 0,-5 0,3370 20,3390 3935,3390 3955,3370 3955,3355 3955,0 3950,-5 0,-5

## Silkscreen, mask and mechanical layers (free items; w line width, h text height)
Top Overlay:
  text "Mach" at 2295,2890 h150
  text "phun suong" at 2300,2693.32 h160
  text "Tran Hai" at 370,165 h200
Mechanical 1:
  lines w47.24: -2215,-1515 -2215,2485 ; -2215,-1515 3785,-1515 ; -2215,-1515 -2215,2485 ; -2215,-1515 3785,-1515 ; -2215,2485 3785,2485 ; -2215,2485 3785,2485 ; 3785,-1515 3785,2485 ; 3785,-1515 3785,2485
Mechanical 13:
  lines w47.24: -2215,-1515 -2215,2485 3785,2485 3785,-1515 -2215,-1515

## Text inside footprints (layer, text, board x,y; h text height)
J1: Mechanical 13 "PCB EDGE" at 70.2,740.28 h30 r270